# Altium PCB GPS-speed1.PcbDoc
Units mm, origin at the board's own origin, x right, y up, seen from the top; angles counter-clockwise.
Board outline 152.4 x 101.6 mm, 2 copper layers (Top Layer, Bottom Layer); 25 components, 27 nets, 142 pads, 0 vias.
Unrouted connection lines stored in the file: 5.
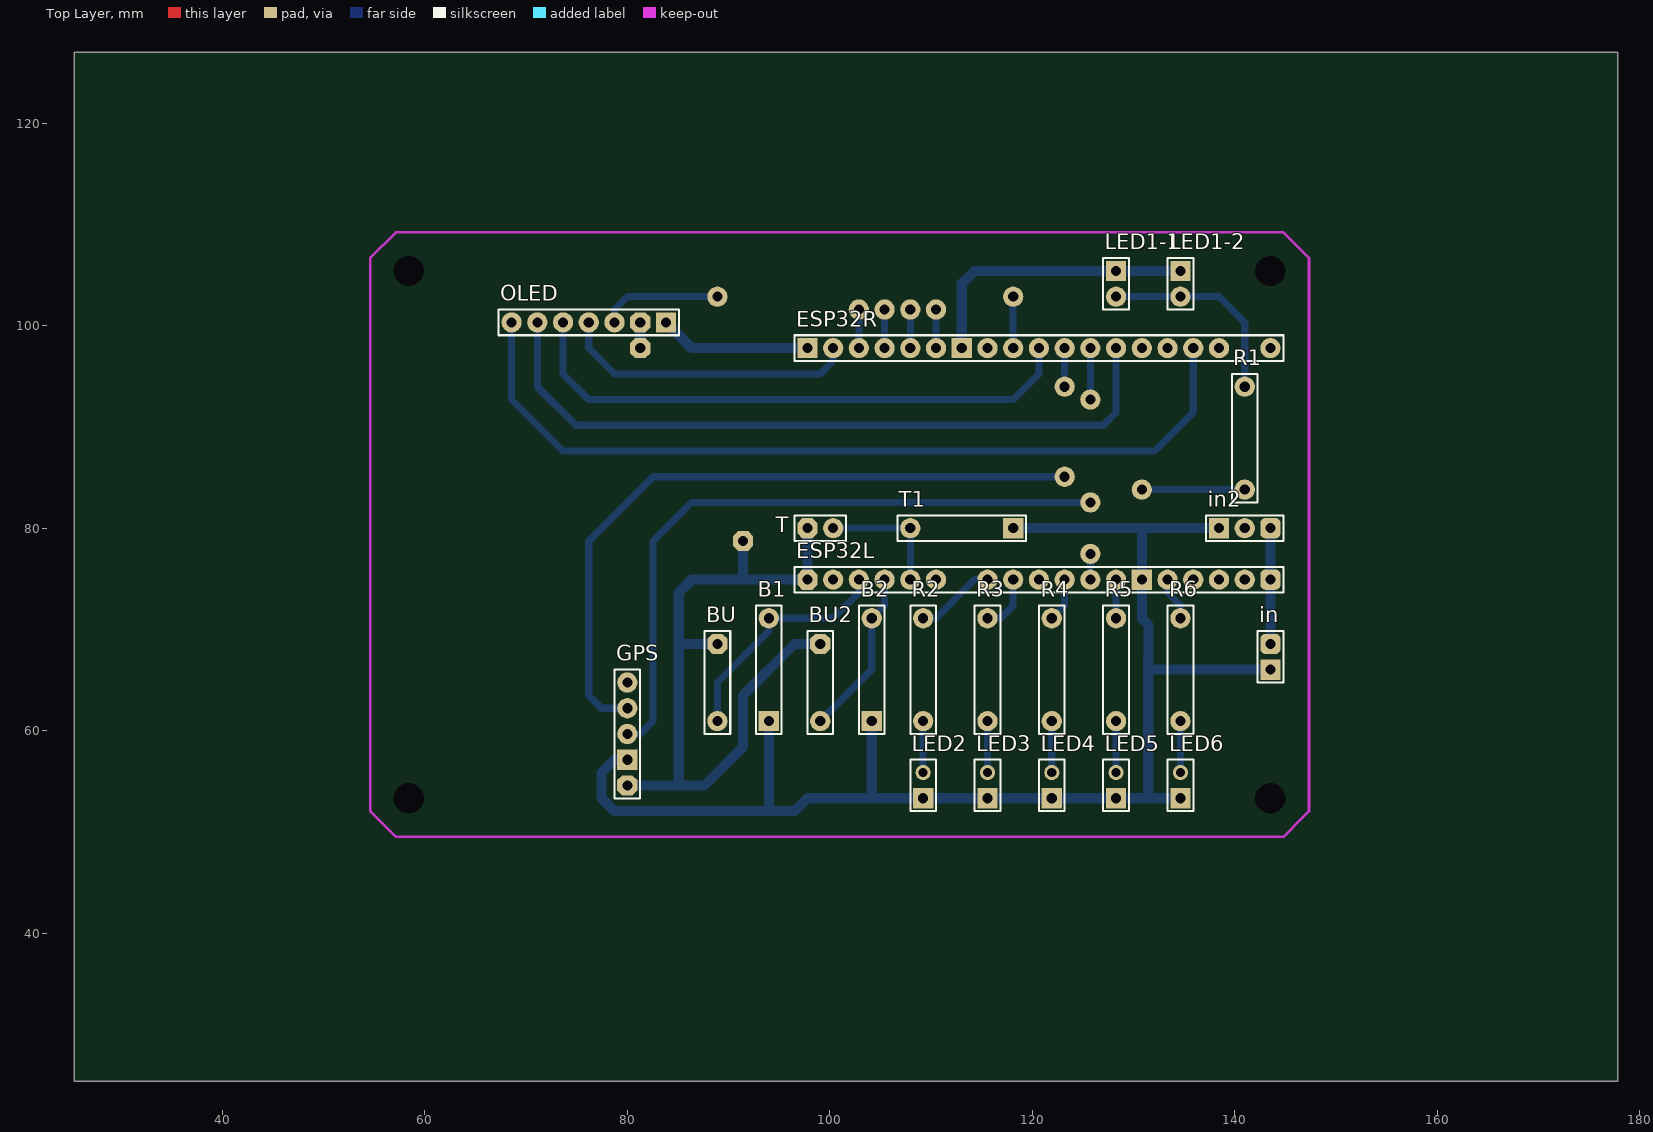
[diagram p0: Top Layer view]
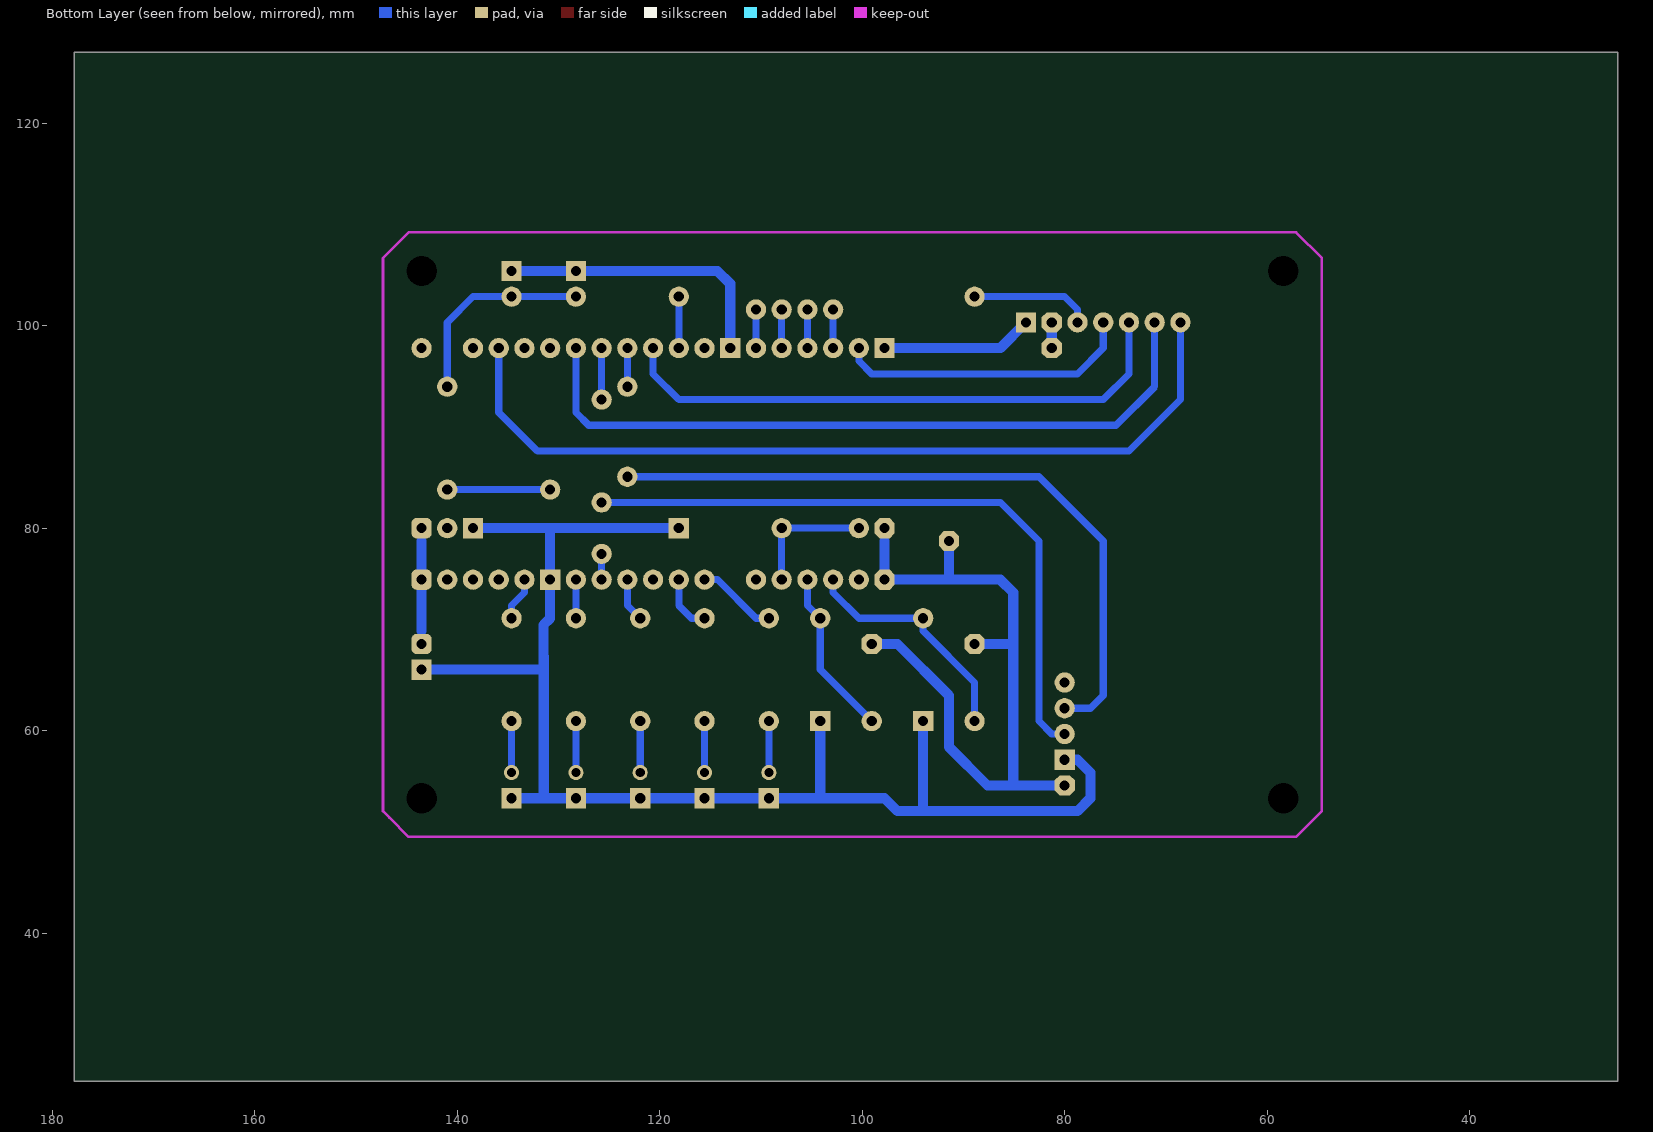
[diagram p1: Bottom Layer view, seen from below]

## Layer stack, top to bottom
Top Solder: solder mask 0.0102, Solder Resist, Dk 3.5
Top Layer: signal copper 0.0356
Dielectric 1: dielectric 0.32, FR-4, Dk 4.8
Bottom Layer: signal copper 0.0356
Bottom Solder: solder mask 0.0102, Solder Resist, Dk 3.5

## Board outline
25.4,25.4 177.8,25.4 177.8,127 25.4,127

## Design rules (kind name [scope] priority, off if disabled: settings)
Clearance [All] p1: gap=0.254 ignorepadtopadclearanceinfootprint=FALSE except(0: Arc-Hole Track-Hole SMDPad-Hole THPad-Hole Via-Hole Fill-Hole Poly-Hole Region-Hole Text-Hole)
PolygonConnect [All] p1: connectstyle=Relief reliefconductorwidth=0.254 reliefentries=4 polygonreliefangle="90 Angle" airgapwidth=0.254
RoutingVias [All] p1: holewidth=0.711 width=1.27 viastyle="Through Hole" minholewidth=0.711 minwidth=1.27 maxholewidth=0.711 maxwidth=1.27
SolderMaskExpansion [All] p1: expansion=0.102
Width Width_1 [InNet('GND','GND1','GND2','3.3V','5V')] p1: maxlimit=2 minlimit=0.254 preferedwidth=1
Width [All] p2: maxlimit=2 minlimit=0.254 preferedwidth=0.7
30 further rules are at their usual default settings.

## Components (designator, comment, footprint, x,y, rotation, side; value= is the part's Value field where it differs from the comment)
B1 "Header 5" HDR1X5#1 93.98,60.96 r90 top
B2 "Header 5" HDR1X5#1 104.14,60.96 r90 top
BU "Header 4" HDR1X4 88.9,60.96 r90 top
BU2 "Header 4" HDR1X4 99.06,60.96 r90 top
ESP32L "Header 19" HDR1X19#1 97.79,74.93 r0 top
ESP32R "Header 19" HDR1X19#2 97.79,97.79 r0 top
GPS "Header 5" HDR1X5#2 80.01,64.77 r270 top
in "Header 2" HDR1X2#1 143.51,66.04 r90 top
in2 "Header 3" HDR1X3 138.43,80.01 r0 top
LED1-1 "Header 2" HDR1X2#2 128.27,105.41 r270 top
LED1-2 "Header 2" HDR1X2#2 134.62,105.41 r270 top
LED2 "Header 2" HDR1X2#3 109.22,53.34 r90 top
LED3 "Header 2" HDR1X2#3 115.57,53.34 r90 top
LED4 "Header 2" HDR1X2#3 121.92,53.34 r90 top
LED5 "Header 2" HDR1X2#3 128.27,53.34 r90 top
LED6 "Header 2" HDR1X2#3 134.62,53.34 r90 top
OLED "Header 7" HDR1X7 83.82,100.33 r180 top
R1 "Header 5" HDR1X5#3 140.97,83.82 r90 top
R2 "Header 5" HDR1X5#3 109.22,60.96 r90 top
R3 "Header 5" HDR1X5#3 115.57,60.96 r90 top
R4 "Header 5" HDR1X5#3 121.92,60.96 r90 top
R5 "Header 5" HDR1X5#3 128.27,60.96 r90 top
R6 "Header 5" HDR1X5#3 134.62,60.96 r90 top
T "Header 2" HDR1X2#4 100.33,80.01 r180 top
T1 "Header 5" HDR1X5#1 118.11,80.01 r180 top

## Footprints (in the part's own frame and the unit in brackets; to place one, negate y for a bottom-side part, rotate by r counter-clockwise, add the part's x,y. Pads: shape width x height; smd on the part's side, far side on the other; paste and mask are expansions set on the pad)
HDR1X2#1 [mm] "Connector; Header; 2 Position"
  rect 2x2 hole 1: 1(0,0)
  rrect50% 2x2 hole 1: 2(2.54,0)
  silkscreen extent -1.27,-1.27 3.81,1.27
HDR1X2#2 [mm] "Connector; Header; 2 Position"
  rect 2x2 hole 1: 1(0,0)
  round 2 hole 1: 2(2.54,0)
  silkscreen extent -1.27,-1.27 3.81,1.27
HDR1X2#3 [mm] "Connector; Header; 2 Position"
  rect 2x2 hole 1: 1(0,0)
  round 1.5 hole 0.9: 2(2.54,0)
  silkscreen extent -1.27,-1.27 3.81,1.27
HDR1X2#4 [mm] "Connector; Header; 2 Position"
  round 2 hole 1: 1(0,0)
  oct 2x2 hole 1: 2(2.54,0)
  silkscreen extent -1.27,-1.27 3.81,1.27
HDR1X3 [mm] "Connector; Header; 3 Position"
  rect 2x2 hole 1: 1(0,0)
  round 2 hole 1: 2(2.54,0)
  rrect50% 2x2 hole 1: 3(5.08,0)
  silkscreen extent -1.27,-1.27 6.35,1.27
HDR1X4 [mm] "Connector; Header; 4 Position"
  round 2 hole 1: 1(0,0)
  round 0 all layers, no hole: 2(2.54,0) 3(5.08,0)
  oct 2x2 hole 1: 4(7.62,0)
  silkscreen extent -1.27,-1.27 8.89,1.27
HDR1X5#1 [mm] "Connector; Header; 5 Position"
  rect 2x2 hole 1: 1(0,0)
  round 0 all layers, no hole: 2(2.54,0) 3(5.08,0) 4(7.62,0)
  round 2 hole 1: 5(10.16,0)
  silkscreen extent -1.27,-1.27 11.43,1.27
HDR1X5#2 [mm] "Connector; Header; 5 Position"
  round 2 hole 1: 1(0,0) 2(2.54,0) 3(5.08,0)
  rect 2x2 hole 1: 4(7.62,0)
  oct 2x2 hole 1: 5(10.16,0)
  silkscreen extent -1.27,-1.27 11.43,1.27
HDR1X5#3 [mm] "Connector; Header; 5 Position"
  round 2 hole 1: 1(0,0) 5(10.16,0)
  round 0 all layers, no hole: 2(2.54,0) 3(5.08,0) 4(7.62,0)
  silkscreen extent -1.27,-1.27 11.43,1.27
HDR1X7 [mm] "Connector; Header; 7 Position"
  rect 2x2 hole 1: 1(0,0)
  oct 2x2 hole 1: 2(2.54,0)
  round 2 hole 1: 3(5.08,0) 4(7.62,0) 5(10.16,0) 6(12.7,0) 7(15.24,0)
  silkscreen extent -1.27,-1.27 16.51,1.27
HDR1X19#1 [mm] "Connector; Header; 19 Position"
  oct 2x2 hole 1: 1(0,0)
  round 2 hole 1: 2(2.54,0) 3(5.08,0) 4(7.62,0) 5(10.16,0) 6(12.7,0) 8(17.78,0) 9(20.32,0) 10(22.86,0) 11(25.4,0) 12(27.94,0) 13(30.48,0) 15(35.56,0) 16(38.1,0) 17(40.64,0) 18(43.18,0)
  round 0 all layers, no hole: 7(15.24,0)
  rect 2x2 hole 1: 14(33.02,0)
  rrect50% 2x2 hole 1: 19(45.72,0)
  silkscreen extent -1.27,-1.27 46.99,1.27
HDR1X19#2 [mm] "Connector; Header; 19 Position"
  rect 2x2 hole 1: 1(0,0) 7(15.24,0)
  round 2 hole 1: 2(2.54,0) 3(5.08,0) 4(7.62,0) 5(10.16,0) 6(12.7,0) 8(17.78,0) 9(20.32,0) 10(22.86,0) 11(25.4,0) 12(27.94,0) 13(30.48,0) 14(33.02,0) 15(35.56,0) 16(38.1,0) 17(40.64,0) 19(45.72,0)
  round 0 all layers, no hole: 18(43.18,0)
  silkscreen extent -1.27,-1.27 46.99,1.27

## Part data
B1 B2 GPS R1 R2 R3 R4 R5 R6 T1: "Header, 5-Pin", LatestRevisionDate=17-Jul-2002, LatestRevisionNote="Re-released for DXP Platform.", Publisher="Altium Limited"
BU BU2: "Header, 4-Pin", LatestRevisionDate=17-Jul-2002, LatestRevisionNote="Re-released for DXP Platform.", Publisher="Altium Limited"
ESP32L ESP32R: "Header, 19-Pin", LatestRevisionDate=17-Jul-2002, LatestRevisionNote="Re-released for DXP Platform.", Publisher="Altium Limited"
in LED1-1 LED1-2 LED2 LED3 LED4 LED5 LED6 T: "Header, 2-Pin", LatestRevisionDate=17-Jul-2002, LatestRevisionNote="Re-released for DXP Platform.", Publisher="Altium Limited"
in2: "Header, 3-Pin", LatestRevisionDate=17-Jul-2002, LatestRevisionNote="Re-released for DXP Platform.", Publisher="Altium Limited"
OLED: "Header, 7-Pin", LatestRevisionDate=17-Jul-2002, LatestRevisionNote="Re-released for DXP Platform.", Publisher="Altium Limited"

## Free pads (board coordinates)
  round 2 hole 1: 2(123.19,85.09) 4(123.19,93.98) 5(125.73,92.71) 10(125.73,82.55) 11(130.81,83.82) 12(125.73,77.47) 13(88.9,102.87) 16(118.11,102.87) 17(110.49,101.6) 18(107.95,101.6) 19(105.41,101.6) 20(102.87,101.6)
  round 0 hole 3: 6(58.42,105.41) 7(58.42,53.34) 8(143.51,53.34) 9(143.51,105.41)
  oct 2x2 hole 1: 14(81.28,97.79) 15(91.44,78.74)

## Nets (pads, with @x,y where several pads share a name; then routed paths per layer and width w, separated by ;. In a path a pad name is that pad's centre, name@x,y a point inside that pad or via, vN(x,y) a via of type N, cw(c..) or ccw(c..) an arc to the next point about the centre after c; other vN are vias at no path point)
3.3V: BU2.4 BU.4 ESP32L.1 GPS.5 OLED.2 pad.14 pad.15 T.2 | length 74.1
  Bottom Layer w1: GPS.5 85.09,54.61 ; pad.14 OLED.2 ; BU.4 85.09,68.58 ; pad.15 91.44,74.93 ; 97.79,78.74 ESP32L.1 91.44,74.93 ; BU2.4 96.52,68.58 91.44,63.5 91.44,58.42 87.63,54.61 85.09,54.61 ; 85.09,54.61 85.09,68.58 ; 85.09,68.58 85.09,73.66 86.36,74.93 91.44,74.93
5V: ESP32L.19 in2.3 in.2 | length 8.9
  Bottom Layer w1: 143.51,69.85 ESP32L.19 143.51,78.74
GND: ESP32R.7 LED1-1.1 LED1-2.1 | length 28.5
  Bottom Layer w1: ESP32R.7 113.03,104.14 114.3,105.41 LED1-1.1 LED1-2.1
GND1: ESP32R.1 OLED.1 | length 15
  Bottom Layer w1: OLED.1 86.36,97.79 ESP32R.1
GND2: B1.1 B2.1 ESP32L.14 GPS.4 in2.1 in.1 LED2.1 LED3.1 LED4.1 LED5.1 LED6.1 T1.1 | length 140.9
  Bottom Layer w1: GPS.4 78.74,57.15 77.47,55.88 77.47,53.34 78.74,52.07 93.98,52.07 ; B1.1 93.98,52.07 ; B2.1 104.14,53.34 ; T1.1 130.81,80.01 ; LED6.1 131.445,53.34 ; in2.1 130.81,80.01 ; in.1 131.465,66.04 131.465,67.31 ; 93.98,52.07 96.52,52.07 97.79,53.34 104.14,53.34 ; 104.14,53.34 LED2.1 LED3.1 LED4.1 LED5.1 131.445,53.34 ; 130.81,80.01 ESP32L.14 130.81,71.12 131.465,70.465 131.465,67.31 ; 131.445,53.34 131.445,67.31 131.465,67.31
NetB1_5: B1.5 BU.1 ESP32L.3 | length 23.5
  Bottom Layer w0.7: BU.1 88.9,64.77 93.98,69.85 B1.5 100.33,71.12 102.87,73.66 ESP32L.3
NetB2_5: B2.5 BU2.1 ESP32L.4 | length 16.6
  Bottom Layer w0.7: BU2.1 104.14,66.04 B2.5 105.41,72.39 ESP32L.4
NetESP32L_5: ESP32L.5 T1.5 T.1 | length 12.7
  Bottom Layer w0.7: T.1 T1.5 ESP32L.5
NetESP32L_8: ESP32L.8 R2.5 | length 7.9
  Bottom Layer w0.7: R2.5 110.49,71.12 114.3,74.93 ESP32L.8
NetESP32L_9: ESP32L.9 R3.5 | length 5.6
  Bottom Layer w0.7: R3.5 116.84,71.12 118.11,72.39 ESP32L.9
NetESP32L_11: ESP32L.11 R4.5 | length 4.3
  Bottom Layer w0.7: R4.5 123.19,72.39 ESP32L.11
NetESP32L_12: ESP32L.12 pad.11 pad.12 R1.1 | length 12.7
  Bottom Layer w0.7: ESP32L.12 pad.12 ; pad.11 R1.1
NetESP32L_13: ESP32L.13 R5.5 | length 3.8
  Bottom Layer w0.7: R5.5 ESP32L.13
NetESP32L_15: ESP32L.15 R6.5 | length 4.3
  Bottom Layer w0.7: ESP32L.15 133.35,73.66 134.62,72.39 R6.5
NetESP32R_2: ESP32R.2 OLED.4 | length 29.5
  Bottom Layer w0.7: OLED.4 76.2,97.79 78.74,95.25 99.06,95.25 100.33,96.52 ESP32R.2
NetESP32R_9: ESP32R.9 OLED.3 pad.13 pad.16 | length 17
  Bottom Layer w0.7: OLED.3 78.74,101.6 80.01,102.87 pad.13 ; ESP32R.9 pad.16
NetESP32R_10: ESP32R.10 OLED.5 | length 56.7
  Bottom Layer w0.7: OLED.5 73.66,95.25 76.2,92.71 118.11,92.71 120.65,95.25 ESP32R.10
NetESP32R_11: ESP32R.11 GPS.2 pad.2 pad.4 | length 73
  Bottom Layer w0.7: GPS.2 77.47,62.23 76.2,63.5 76.2,78.74 82.55,85.09 pad.2 ; pad.4 ESP32R.11
NetESP32R_12: ESP32R.12 GPS.3 pad.5 pad.10 | length 70.7
  Bottom Layer w0.7: GPS.3 81.28,59.69 82.55,60.96 82.55,78.74 86.36,82.55 pad.10 ; pad.5 ESP32R.12
NetESP32R_13: ESP32R.13 OLED.6 | length 72
  Bottom Layer w0.7: OLED.6 71.12,93.98 74.93,90.17 127,90.17 128.27,91.44 ESP32R.13
NetESP32R_16: ESP32R.16 OLED.7 | length 85
  Bottom Layer w0.7: OLED.7 68.58,92.71 73.66,87.63 132.08,87.63 135.89,91.44 ESP32R.16
NetLED1-1_2: LED1-1.2 LED1-2.2 R1.5 | length 20.1
  Bottom Layer w0.7: LED1-1.2 LED1-2.2 138.43,102.87 140.97,100.33 R1.5
NetLED2_2: LED2.2 R2.1 | length 5.1
  Bottom Layer w0.7: LED2.2 R2.1
NetLED3_2: LED3.2 R3.1 | length 5.1
  Bottom Layer w0.7: LED3.2 R3.1
NetLED4_2: LED4.2 R4.1 | length 5.1
  Bottom Layer w0.7: LED4.2 R4.1
NetLED5_2: LED5.2 R5.1 | length 5.1
  Bottom Layer w0.7: LED5.2 R5.1
NetLED6_2: LED6.2 R6.1 | length 5.1
  Bottom Layer w0.7: LED6.2 R6.1
pads on no net: B1.2 B1.3 B1.4 B2.2 B2.3 B2.4 BU2.2 BU2.3 BU.2 BU.3 ESP32L.2 ESP32L.6 ESP32L.7 ESP32L.10 ESP32L.16 ESP32L.17 ESP32L.18 ESP32R.3 ESP32R.4 ESP32R.5 ESP32R.6 ESP32R.8 ESP32R.14 ESP32R.15 ESP32R.17 ESP32R.18 ESP32R.19 GPS.1 in2.2 R1.2 R1.3 R1.4 R2.2 R2.3 R2.4 R3.2 R3.3 R3.4 R4.2 R4.3 R4.4 R5.2 R5.3 R5.4 R6.2 R6.3 R6.4 T1.2 T1.3 T1.4
copper on no net: | length 15.2
  Bottom Layer w0.7: 102.87,97.79 102.87,101.6 ; 105.41,97.79 105.41,101.6 ; 107.95,97.79 107.95,101.6 ; 110.49,97.79 110.49,101.6

## Keep-outs
Keep-Out Layer:
  lines w0.254: 54.61,52.07 54.61,106.68 57.15,109.22 140.97,109.22 144.78,109.22 146.05,107.95 147.32,106.68 147.32,52.07 146.844,51.594 146.685,51.435 144.78,49.53 57.15,49.53 54.61,52.07